# Altium PCB Thruster_V1.0.PcbDoc
Units mil, origin at the board's own origin, x right, y up, seen from the top; angles counter-clockwise.
Board outline 2185 x 1425 mil, 2 copper layers (Top Layer, Bottom Layer); 65 components, 50 nets, 244 pads, 29 vias.
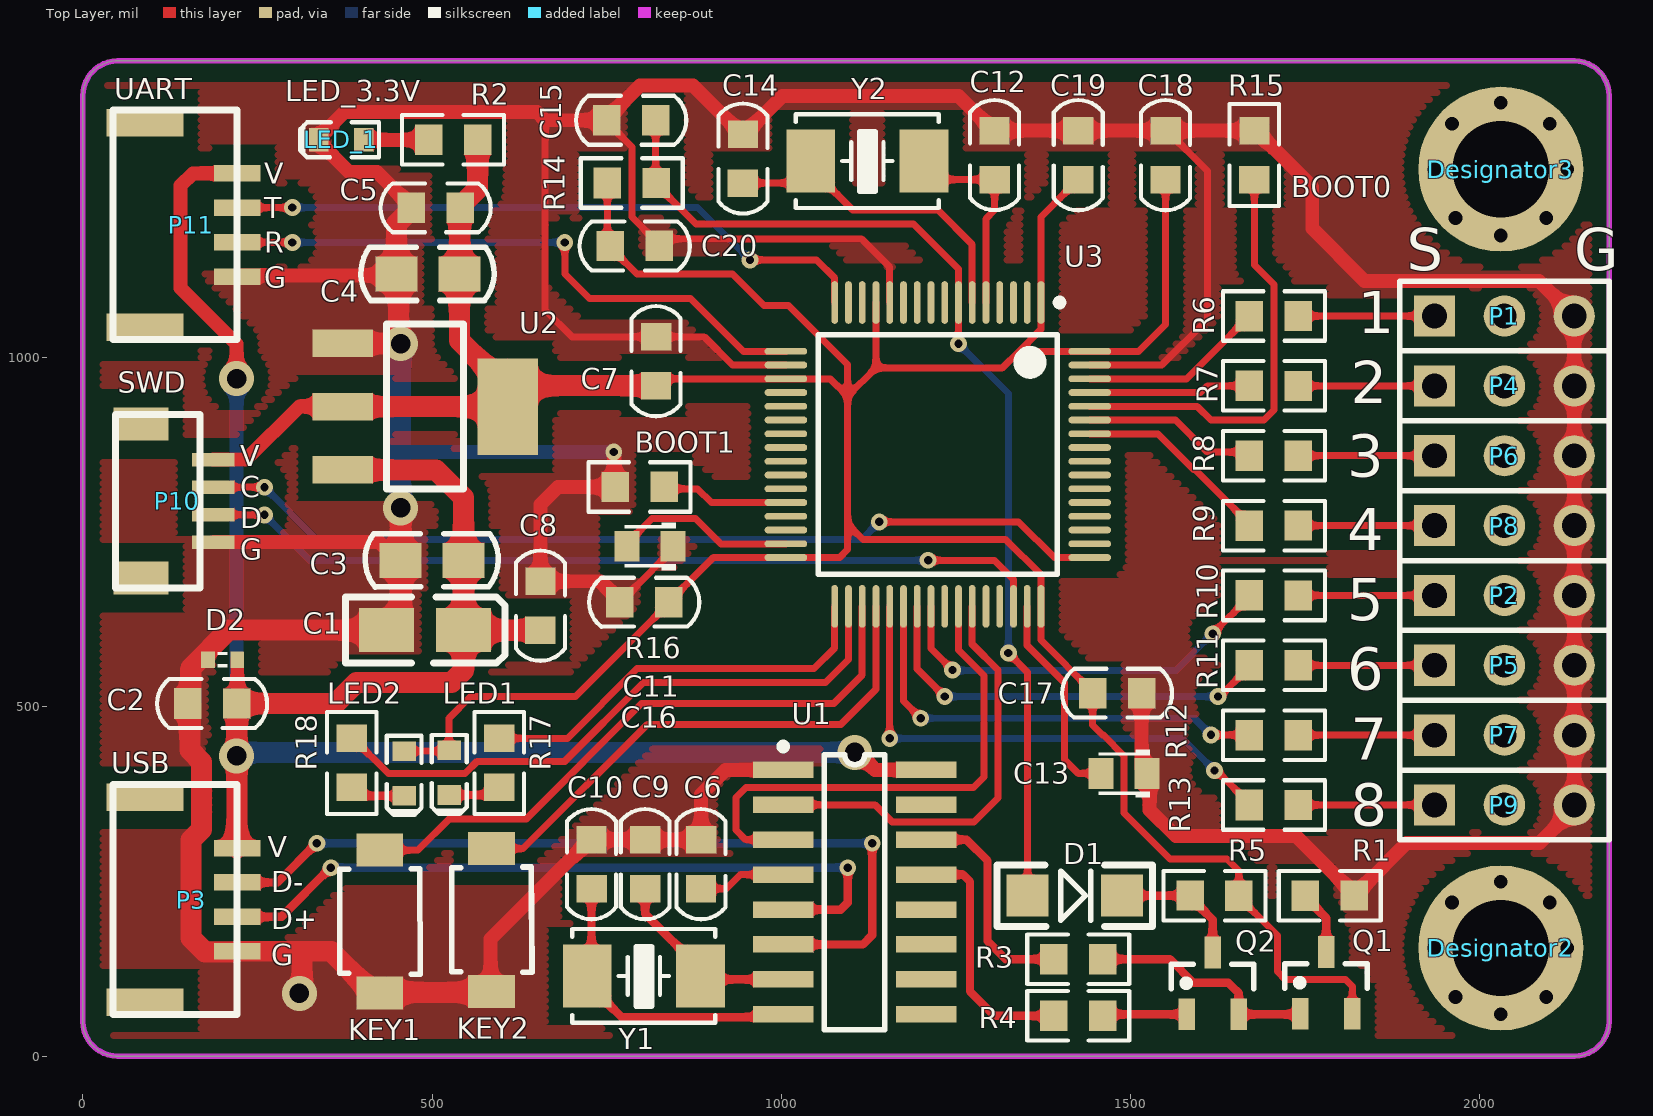
[diagram p0: Top Layer view]
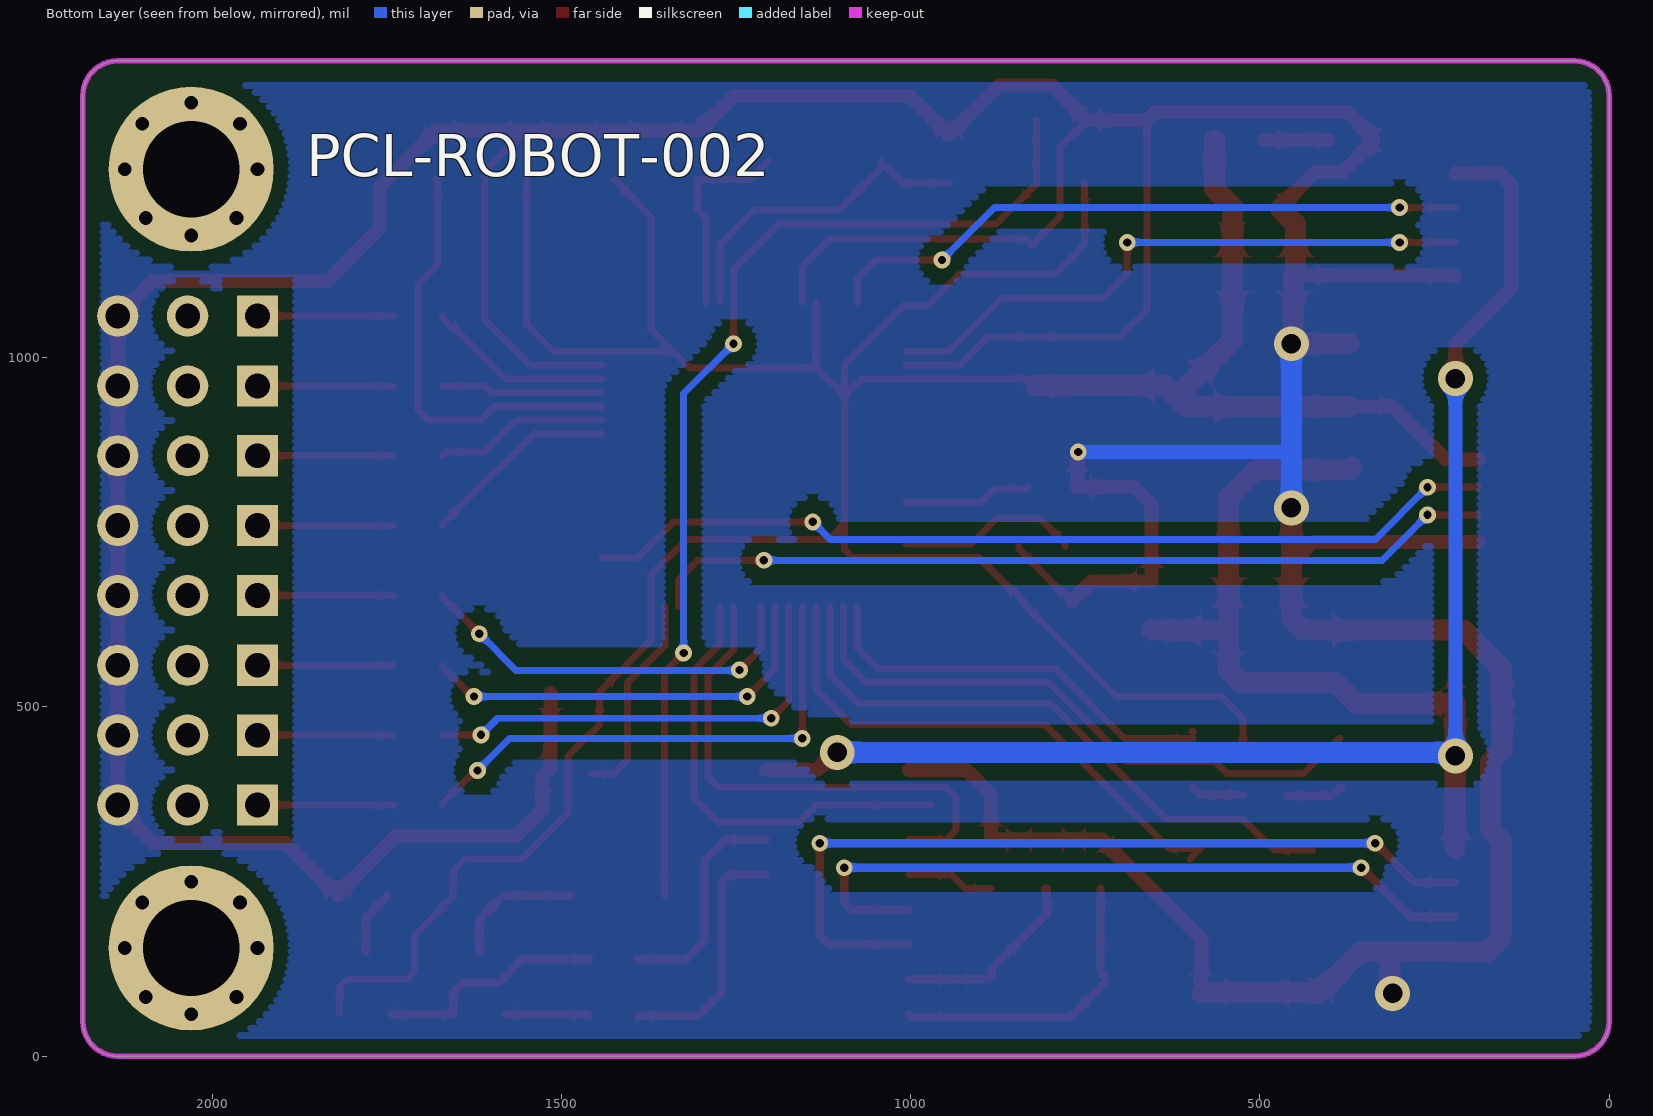
[diagram p1: Bottom Layer view, seen from below]
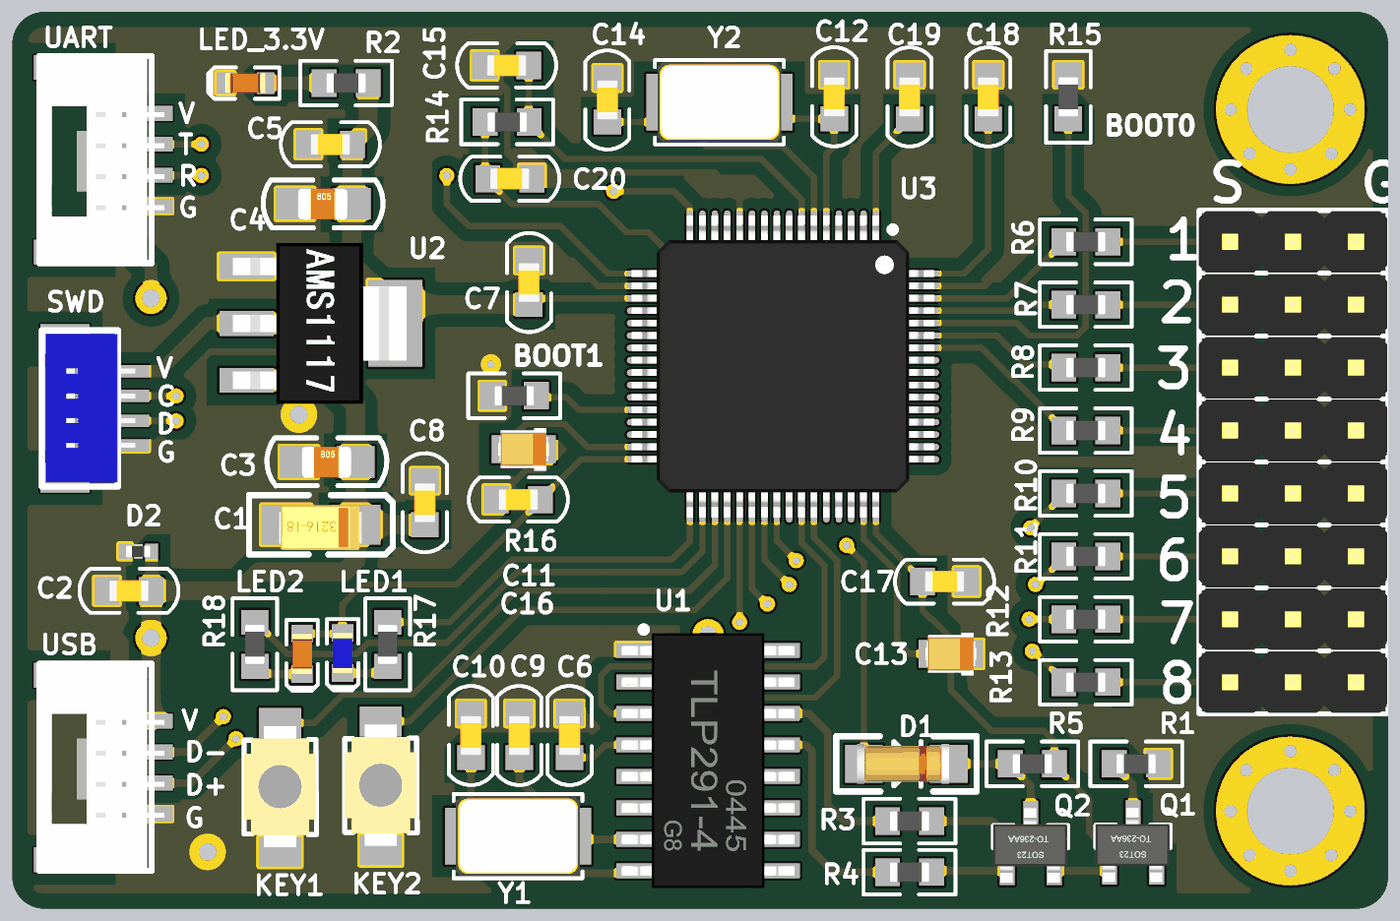
[diagram p2: 3D render of the assembled board from above, using the file's embedded part models]

## Layer stack, top to bottom
Top Solder: solder mask 0.4, Solder Resist, Dk 3.5
Top Layer: signal copper 1.4
Dielectric 1: dielectric 12.6, FR-4, Dk 4.8
Bottom Layer: signal copper 1.4
Bottom Solder: solder mask 0.4, Solder Resist, Dk 3.5

## Board outline
0,50 0,1375 cw(c50,1375) 50,1425 2135,1425 cw(c2135,1375) 2185,1375 2185,50 cw(c2135,50) 2135,0 50,0 cw(c50,50)

## Design rules (kind name [scope] priority, off if disabled: settings)
Clearance Clearance_InPolygon [All vs InPolygon] p1: gap=20 ignorepadtopadclearanceinfootprint=FALSE except(0: Arc-Hole Track-Hole SMDPad-Hole THPad-Hole Via-Hole Fill-Hole Poly-Hole Region-Hole Text-Hole)
Clearance Clearance_8 [All] p2: gap=8 ignorepadtopadclearanceinfootprint=FALSE except(0: Arc-Hole Track-Hole SMDPad-Hole THPad-Hole Via-Hole Fill-Hole Poly-Hole Region-Hole Text-Hole)
Clearance Clearance_MCU [(InComponent('U3'))] p3: gap=6 ignorepadtopadclearanceinfootprint=TRUE except(0: Arc-Hole Track-Hole SMDPad-Hole THPad-Hole Via-Hole Fill-Hole Poly-Hole Region-Hole Text-Hole)
Clearance [All] p4: gap=10 ignorepadtopadclearanceinfootprint=FALSE except(0: Arc-Hole Track-Hole SMDPad-Hole THPad-Hole Via-Hole Fill-Hole Poly-Hole Region-Hole Text-Hole)
ComponentClearance ComponentClearance_PWM [InComponent('P1')OR InComponent('P2')OR InComponent('P4')OR InComponent('P6')OR InComponent('P5')OR InComponent('P7')OR InComponent('P8')OR InComponent('P9')] p1: gap=0 collisioncheckmode=3 verticalgap=0 showdistances=TRUE
ComponentClearance [All] p2: gap=10 collisioncheckmode=3 verticalgap=10 showdistances=FALSE
HoleSize [All] p1: absolutevalues=TRUE maxlimit=300 minlimit=1 maxpercent=80.000 minpercent=20.000
MinimumSolderMaskSliver [All] p1: minsoldermaskwidth=1
PolygonConnect [All] p1: connectstyle=Direct reliefconductorwidth=10 reliefentries=4 polygonreliefangle="90 Angle" airgapwidth=10
RoutingVias RoutingVias_small [All] p1: holewidth=12 width=24 viastyle="Through Hole" minholewidth=8 minwidth=24 maxholewidth=28 maxwidth=50
RoutingVias [All] p2: holewidth=28 width=50 viastyle="Through Hole" minholewidth=28 minwidth=50 maxholewidth=28 maxwidth=50
SilkToSilkClearance [All] p1: silktosilkclearance=0
SilkToSolderMaskClearance [IsPad] p1: minsilkscreentomaskgap=0 clearancetoexposedcopper=TRUE
SolderMaskExpansion [All] p1: expansion=4
Width [All] p1: maxlimit=50 minlimit=10 preferedwidth=10
25 further rules are at their usual default settings.

## Components (designator, comment, footprint, x,y, rotation, side; value= is the part's Value field where it differs from the comment)
C1 "10uf/3216T/10V" "Cap Poll 1(3216T)" 490,610 r0 top value=10uF
C2 "0.1uF/0603/50V" 0603C 185,505 r180 top value=0.1uF
C3 "CAP" 0805C 500,710 r0 top value=22uF/0805/25V
C4 "CAP" 0805C 494,1120 r0 top value=22uF/0805/25V
C5 "0.1uF/0603/50V" 0603C 505,1214.61 r180 top value=0.1uF
C6 "0.1uF/0603/50V" 0603C 885,275 r90 top value=0.1uF
C7 "0.1uF/0603/50V" 0603C 820.57,995 r90 top value=0.01uF
C8 "0.1uF/0603/50V" 0603C 655,645 r270 top value=0.1uF
C9 "20pF/0603/50V" 0603C 805,275 r270 top value=0.1uF
C10 "20pF/0603/50V" 0603C 728.22,275 r270 top value=0.1uF
C11 "Cap_Tan_0805" Cap_Tan_0805 812,730 r0 top value=2.2uF
C12 "20pF/0603/50V" 0603C 1305.26,1290.14 r270 top value=0.1uF
C13 "Cap_Tan_0805" Cap_Tan_0805 1490.57,404.71 r0 top value=2.2uF
C14 "20pF/0603/50V" 0603C 945,1285.14 r270 top value=0.1uF
C15 "0.1uF/0603/50V" 0603C 785,1340 r180 top value=0.1uF
C16 "0.1uF/0603/50V" 0603C 803.57,650 r180 top value=0.01uF
C17 "0.1uF/0603/50V" 0603C 1480.57,519.71 r0 top value=0.01uF
C18 "0.1uF/0603/50V" 0603C 1550,1290 r90 top value=0.01uF
C19 "0.1uF/0603/50V" 0603C 1425,1290 r90 top value=0.01uF
C20 "0.1uF/0603/50V" 0603C 790,1160 r0 top value=0.01uF
D1 "1N4148" 1206D 1420,230 r180 top
D2 "PESD0402-140" 0402R 200,567.76 r0 top
Designator2 "Comment" M3固定孔 2030,155 r0 top
Designator3 "Comment" M3固定孔 2030,1270 r0 top
KEY1 "KEY1" "button-3x4x2mm 2 Pad" 425,192.64 r90 top
KEY2 "KEY2" "button-3x4x2mm 2 Pad" 585,195 r90 top
LED1 "LED_0603" LED_0603_BLUE 524.54,406 r90 top
LED2 "LED_0603" LED_0603_RED 460,404.71 r90 top
LED_1 "LED_3.3V" LED_0603_RED 370,1312 r0 top
P1 "HEADER3" HEADER3 1935,1059.71 r0 top locked
P2 "HEADER3" HEADER3 1935,659.71 r0 top locked
P3 "USB" HEADER-GH1.25-4P 155,224.15 r270 top
P4 "HEADER3" HEADER3 1935,959.71 r0 top locked
P5 "HEADER3" HEADER3 1935,559.71 r0 top locked
P6 "HEADER3" HEADER3 1935,859.71 r0 top locked
P7 "HEADER3" HEADER3 1935,459.71 r0 top locked
P8 "HEADER3" HEADER3 1935,759.71 r0 top locked
P9 "HEADER3" HEADER3 1935,359.71 r0 top locked
P10 "SWD" HEADER-SH1.0-4P-A 135,795 r270 top
P11 "UART" HEADER-GH1.25-4P 155,1190 r270 top
Q1 "PNP(S9012/S8550)" NPN(S8050/S9103)贴片 1780,105 r270 top
Q2 "NPN（S9013/S8050）" NPN(S8050/S9103)贴片 1617.4,104.29 r270 top
R1 "1KΩ/0603/5%" 0603R 1785,230 r180 top value=10K
R2 "510Ω/0603/5%" 0603R 530,1312 r0 top value=510Ω
R3 "1KΩ/0603/5%" 0603R 1425,138.94 r180 top value=10K
R4 "1KΩ/0603/5%" 0603R 1425,57.83 r180 top value=10K
R5 "10KΩ/0603/5%" 0603R 1620,230 r0 top value=10K
R6 "1KΩ/0603/5%" 0603R 1705,1059.71 r180 top value=10K
R7 "1KΩ/0603/5%" 0603R 1705,959.71 r180 top value=10K
R8 "1KΩ/0603/5%" 0603R 1705,859.71 r180 top value=10K
R9 "1KΩ/0603/5%" 0603R 1705,759.71 r180 top value=10K
R10 "1KΩ/0603/5%" 0603R 1705,659.71 r180 top value=10K
R11 "1KΩ/0603/5%" 0603R 1705,559.71 r180 top value=10K
R12 "1KΩ/0603/5%" 0603R 1705,459.71 r180 top value=10K
R13 "1KΩ/0603/5%" 0603R 1705,359.71 r180 top value=10K
R14 "10KΩ/0603/5%" 0603R 785.85,1250.14 r180 top value=10K
R15 "10KΩ/0603/5%" 0603R 1677.17,1290.14 r270 top value=10K
R16 "10KΩ/0603/5%" 0603R 797,815 r0 top value=10K
R17 "680Ω/0603/5%" 0603R 595.98,420 r270 top value=10K
R18 "680Ω/0603/5%" 0603R 385,420 r270 top value=10K
U1 "CH340G" SOP16M 1105,235 r270 top
U2 "AMS1117-3.3" AMS1117(SOT-223) 490,930 r180 top
U3 "STM32F405RGT6" STM32_LQFP64 1210,860.58 r180 top
Y1 "12MHz/5032" XT_5032_2P 803.03,115 r0 top value=32.768KHz
Y2 "8MHz/5032" XT_5032_2P 1123,1281.45 r0 top value=32.768KHz

## Footprints (in the part's own frame and the unit in brackets; to place one, negate y for a bottom-side part, rotate by r counter-clockwise, add the part's x,y. Pads: shape width x height; smd on the part's side, far side on the other; paste and mask are expansions set on the pad)
0402R [mil] "贴片电阻的英制0402封装（公制1005）"
  rect 20x24 smd: 1(-21,0) 2(21,0)
  Top Layer pour cut-out: -11,12 11,12 11,-12 -11,-12
  silkscreen extent -7,-11 7,11, body extent -20,-10 19,10, height 24
0603C [mm] "电容0603封装"
  rect 1x1.1 smd: 1(-0.889,0)
  rect 1x1.11 smd: 2(0.889,0)
  silkscreen extent -2,-0.89 2,0.89, body extent -0.8,-0.43 0.8,0.43, height 0.8
0603R [mm] "电阻的0603封装"
  rect 1x1.1 smd: 1(-0.889,0)
  rect 1x1.11 smd: 2(0.889,0)
  silkscreen extent -1.85,-0.9 1.85,0.9, body extent -0.8,-0.4 0.8,0.4, height 0.55
0805C [mil] "电容的0805封装"
  rect 60x50 smd: 1(-45,0) 2(45,0)
  silkscreen extent -96,-38 95,38, body extent -40,-25 38,24, height 31
1206D [mil] "1N4148 IN4148 LL4148 1206封装 圆柱形"
  rect 60x60 smd: 1(67.5,0) 2(-67.5,0)
  silkscreen extent -112,-44 112,44, body extent -68,-31 78,31, height 62
AMS1117(SOT-223) [mm]
  rect 2.2x1 smd: 1(3,-2.3) 2(3,0) 3(3,2.3)
  rect 2.2x3.5 smd: 2(-3,0)
  silkscreen extent -1.4,-3 1.4,3, body extent -3.45,-3.25 3.55,3.25, height 1.85
"button-3x4x2mm 2 Pad" [mm] "贴片按键封装，3x4x2mm - 2 Pad"
  rect 1.2x1.7 smd: 1(-2.6,0) 2(2.6,0)
  silkscreen extent -1.91,-1.47 1.93,1.45, body extent -2.42,-1.45 2.48,1.45, height 2
"Cap Poll 1(3216T)" [mm] "电解电容，钽电容，3216T封装尺寸，4.8 mmX 1.2mm"
  rect 2x1.6 smd: 1(1.4,0) 2(-1.4,0)
  silkscreen extent -2.9,-1.2 2.9,1.2, body extent -1.72,-1.01 1.68,0.79, height 1.8
Cap_Tan_0805 [mil] "钽电容，0805封装尺寸"
  rect 36x44 smd: 1(33,0) 2(-33,0)
  Top Layer pour cut-out: 15,-22 -15,-22 -15,22 15,22
  silkscreen extent -36,-34 36,34, body extent -40,-27 40,27, height 59
HEADER3 [mm]
  rect 1.5x1.5 hole 0.9: 1(0,0)
  round 1.5 hole 0.9: 2(2.54,0) 3(5.08,0)
  silkscreen extent -1.27,-1.27 6.35,1.27, body extent -1.3,-1.24 6.32,1.25, height 8.54
HEADER-GH1.25-4P [mm] "1.25mm立式贴片"
  rect 1x2.8 smd mask+0.07: 0(-3.725,-1.675) 0(3.725,-1.675)
  rect 0.6x1.7 smd mask+0.07: 1(-1.875,1.675) 2(-0.625,1.675) 3(0.625,1.675) 4(1.875,1.675)
  silkscreen extent -4.19,-2.85 4.17,1.68, body extent -4.07,-2.76 4.18,2.19, height 4.2
HEADER-SH1.0-4P-A [mm] "1mm卧式贴片"
  rect 0.5x1.55 smd mask+0.07: 1(-1.5,1.313) 2(-0.5,1.313) 3(0.5,1.313) 4(1.5,1.313)
  rect 1.2x2 smd mask+0.07: ""(-2.8,-1.312) ""(2.8,-1.312)
  silkscreen extent -3.15,-2.24 3.16,0.83, body extent -3,-2.08 3,1.52, height 4.25
LED_0603_BLUE [mil]
  rect 28x34 smd: 1(32,0) 2(-32,0)
  Top Layer pour cut-out: 18,-17 -18,-17 -18,17 18,17
  silkscreen extent -59,-25 54,25, body extent -31,-16 31,16, height 30
LED_0603_RED [mil]
  rect 28x34 smd: 1(32,0) 2(-32,0)
  Top Layer pour cut-out: 18,-17 -18,-17 -18,17 18,17
  silkscreen extent -59,-25 54,25, body extent -31,-16 31,16, height 30
M3固定孔 [mm]
  round 1 hole 0.5: 1(-2.413,0) 1(-1.778,1.651) 1(-1.651,-1.778) 1(0,-2.413) 1(0,2.413) 1(1.651,-1.778) 1(1.778,1.651) 1(2.413,0)
  round 6 hole 3.5: 1(0,0)
NPN(S8050/S9103)贴片 [mm] "SOT23-3贴片封装 ,S8050,S9103"
  rect 1.15x0.6 smd: B(1.125,-0.95) C(-1.125,0) E(1.125,0.95)
  silkscreen extent -0.7,-1.5 0.2,1.5, body extent -1.4,-1.52 1.6,1.48, height 1.3
SOP16M [mm]
  rect 0.6x2.2 smd: 1(-4.445,-2.6) 2(-3.175,-2.6) 3(-1.905,-2.6) 4(-0.635,-2.6) 5(0.635,-2.6) 6(1.905,-2.6) 7(3.175,-2.6) 8(4.445,-2.6) 9(4.445,2.6) 10(3.175,2.6) 11(1.905,2.6) 12(0.635,2.6) 13(-0.635,2.6) 14(-1.905,2.6) 15(-3.175,2.6) 16(-4.445,2.6)
  silkscreen extent -5.42,-2.72 5,1.1, body extent -5.15,-3.5 5.15,3.5, height 2.1
STM32_LQFP64 [mm] "Thin QFP, 64-Leads, Body 10x10mm, Pitch 0.5mm, IPC High Density"
  oval 0.25x1.55 smd: 1(-4.106,-5.55) 2(-3.606,-5.55) 3(-3.106,-5.55) 4(-2.606,-5.55) 5(-2.106,-5.55) 6(-1.606,-5.55) 7(-1.106,-5.55) 8(-0.606,-5.55) 9(-0.106,-5.55) 10(0.394,-5.55) 11(0.894,-5.55) 12(1.394,-5.55) 13(1.894,-5.55) 14(2.394,-5.55) 15(2.894,-5.55) 16(3.394,-5.55) 33(3.394,5.5) 34(2.894,5.5) 35(2.394,5.5) 36(1.894,5.5) 37(1.394,5.5) 38(0.894,5.5) 39(0.394,5.5) 40(-0.106,5.5) 41(-0.606,5.5) 42(-1.106,5.5) 43(-1.606,5.5) 44(-2.106,5.5) 45(-2.606,5.5) 46(-3.106,5.5) 47(-3.606,5.5) 48(-4.106,5.5)
  oval 1.55x0.25 smd: 17(5.169,-3.775) 18(5.169,-3.275) 19(5.169,-2.775) 20(5.169,-2.275) 21(5.169,-1.775) 22(5.169,-1.275) 23(5.169,-0.775) 24(5.169,-0.275) 25(5.169,0.225) 26(5.169,0.725) 27(5.169,1.225) 28(5.169,1.725) 29(5.169,2.225) 30(5.169,2.725) 31(5.169,3.225) 32(5.169,3.725) 49(-5.881,3.725) 50(-5.881,3.225) 51(-5.881,2.725) 52(-5.881,2.225) 53(-5.881,1.725) 54(-5.881,1.225) 55(-5.881,0.725) 56(-5.881,0.225) 57(-5.881,-0.275) 58(-5.881,-0.775) 59(-5.881,-1.275) 60(-5.881,-1.775) 61(-5.881,-2.275) 62(-5.881,-2.775) 63(-5.881,-3.275) 64(-5.881,-3.775)
  silkscreen extent -4.91,-5.68 3.99,4.32, body extent -6.45,-6.13 5.75,6.07, height 1.59
XT_5032_2P [mil] "XTAL_5032_2P"
  rect 70x90 smd: 1(-81,0) 2(81,0)
  silkscreen extent -102,-67 102,67, body extent -98,-63 98,63, height 39

## Part data
C1: library part "Cap Poll", "Polarized Capacitor (Surface Mount)(钽电容)"
C2 C3 C4 C5 C6 C7 C8 C9 C10 C12 C14 C15 C16 C17 C18 C19 C20: library part CAP_0805/0603/0402, "CAP 0805 0603 0402"
C11 C13: "Polarized Capacitor (Surface Mount)(钽电容)"
D1: library part D
D2: library part Diode-PESD0402-140, "TVS二极管"
KEY1 KEY2: library part KEY, "按键"
LED1 LED2: "LED"
LED_1: library part LED, "Typical RED, GREEN, YELLOW, AMBER GaAs LED"
P1 P2 P4 P5 P6 P7 P8 P9: "Header, 3-Pin"
P3 P11: library part HEADER4, "Header, 4-Pin"
P10: library part SWD-下载接口, "SWD调试下载接口"
Q1: "PNP Bipolar Transistor"
Q2: library part NPN(S9103/S8050), "NPN Bipolar Transistor"
R1 R2 R3 R4 R5 R6 R7 R8 R9 R10 R11 R12 R13 R14 R15 R16: library part Res, "Resistor", power=1/16W, precision=1%
R17 R18: library part Res, "Resistor", precision=1%
U1: "USB2UART"
U2: library part AMS1117
U3: "STM32 ARM-based 32-bit MCU with 1024 Kbytes of Flash memory, 64-pin LQFP, Industrial Temperature"
Y1 Y2: library part XTAL, "Crystal Oscillator"

## Via types
v1: diameter 24, hole 12, Top Layer to Bottom Layer, 23 vias
v2: diameter 50, hole 28, Top Layer to Bottom Layer, 6 vias

## Nets (pads, with @x,y where several pads share a name; then routed paths per layer and width w, separated by ;. In a path a pad name is that pad's centre, name@x,y a point inside that pad or via, vN(x,y) a via of type N, cw(c..) or ccw(c..) an arc to the next point about the centre after c; other vN are vias at no path point)
+3.3V: C4.2 C5.1 C7.1 C16.1 C17.1 C18.1 C19.1 C20.1 LED1.1 LED2.1 P10.1 Q1.E R2.2 R5.2 R14.2 U2.2 U3.1 U3.13 U3.19 U3.32 U3.48 U3.64 | length 5242.6
  Top Layer w10: LED2.1 523.26,436.71 LED1.1@523.9,437.36 ; LED1.1 LED1.1@523.9,437.36 ; R14.2 750.85,1162.18 C20.1@755,1158.03 ; C20.1 C20.1@755,1158.03 ; C7.1 830.42,969.85 U3.19 1070,969.85 1094.85,945 ; U3.13@1135.34,1079.18 U3.13 1135.42,985.57 ; C19.1 1423.03,1255 1408.35,1240.31 1408.35,1238.35 1371.64,1201.64 U3.1 1371.56,1079.02 1371.56,1040.78 1340,1009.22 ; C18.1 1550,1047.83 1511.38,1009.22 U3.64 1340,1009.22 ; Q1.E 1817.4,100 1807.4,110 1721.19,110 1710,121.19 1710,172.83 1655,227.83 R5.2 1655,265 1637.69,282.31 1556.26,282.31 1490.57,348 1490.57,430.1 1460.96,459.71 1460,459.71 1445.57,474.14 C17.1 1445.57,521.68 1371.64,595.62 U3.48 U3.48 1371.56,689.5 1321.06,740 1116.72,740 1094.85,761.88 ; LED1.1@523.9,437.36 523.9,483.9 555,515 705.54,515 838.57,648.03 C16.1 838.57,651.97 853.26,666.65 855.23,666.65 902.52,713.94 U3.32 1083.59,713.94 1094.85,725.2 1094.85,761.88 ; C20.1@755,1158.03 793.03,1120 930,1120 975,1075 1010,1075 1094.85,990.15 1094.85,945 ; 1094.85,761.88 1094.85,945 ; 1094.85,945 1135.42,985.57 ; 1135.42,985.57 1315.21,985.57 1315.78,985 1340,1009.22
  Top Layer w20: P10.1 233.82,854.05 310.24,930.48 371.41,930.48 U2.2@371.89,930
  Top Layer w30: U2.2@371.89,930 608.11,930 U2.2@608.11,931.69 ; R2.2 565,1241.57 539.5,1216.07 539.5,1120.5 C4.2 539,1024.7 608.11,955.59 U2.2@608.11,931.69 ; C7.1 636.42,960 U2.2@608.11,931.69
+5V: C1.1 C2.1 C3.2 C8.2 D2.2 P3.1 P11.1 U1.16 U2.3 | length 3104.9
  Top Layer w20: C2.1 221,506 D2.2 ; v2(220,970) 220,1020 140,1100 140,1246.34 157.48,1263.82 P11.1 ; v2(1105,435) 1109.06,435 1134.06,410 U1.16
  Top Layer w30: P3.1 220.47,298.44 220.47,504.53 C2.1 361.52,505 391.52,535 527.54,535 545.12,552.57 C1.1 ; U2.3@368.19,843.15 U2.3 505.55,839.45 545,800 C3.2 545.06,709.94 545.06,610.06 C1.1 ; C8.2 C1.1
  Bottom Layer w20: v2(220,430) v2(220,970)
  Bottom Layer w30: v2(220,430) 225,435 v2(1105,435)
BOOT0: R15.2 U3.60 | length 621.4
  Top Layer w10: U3.60 1595.31,930.48 1615,910.79 1690.79,910.79 1705,925 1705,1105 1677.17,1132.83 R15.2 R15.2@1679.33,1255.14
BOOT1: R16.2 U3.28 | length 183.7
  Top Layer w10: R16.2 834.63,812.37 880,812.37 899.69,792.68 U3.28
CH340_D+: P3.3 U1.5 | length 1049.7
  Top Layer w12: P3.3 284.31,199.54 284.54,199.77 354.77,270 v1(355.1,270) ; U1.5 1085,210 1095,220 v1(1095,270)
  Bottom Layer w12: v1(355.1,270) v1(1095,270)
CH340_D-: P3.2 U1.6 | length 1196.9
  Top Layer w12: P3.2 278.56,248.76 279.8,250 334.8,305 v1(335,305) ; U1.6 1116.72,160 1130,173.28 v1(1130,305)
  Bottom Layer w12: v1(335,305) v1(1130,305)
GND: C1.2 C2.2 C3.1 C4.1 C5.2 C6.2 C7.2 C8.1 C9.1 C10.1 C11.1 C12.1 C13.1 C14.1 C15.2 C16.2 C17.2 C18.2 C19.2 C20.2 D2.1 KEY1.1 KEY2.1 LED_1.2 P1.3 P2.3 P3.4 P4.3 P5.3 P6.3 P7.3 P8.3 P9.3 P10.4 P11.4 R1.1 R15.1 R16.1 U1.1 U2.1 U3.12 U3.18 U3.63 | length 9482.4
  Top Layer w10: 661.85,1340 661.85,1068.15 700,1030 C7.2 889.53,1030 930,989.53 U3.18 ; C15.2 750,1337.83 785.85,1301.98 785.85,1201.31 825,1162.17 C20.2 835,1170 1115,1170 1155.1,1129.9 U3.12 ; C16.2@768.57,652.17 783.26,666.85 785.85,666.85 845,726 C11.1 ; U1.1@1001.68,409.04 U1.1 ; U3.63 1544.53,989.53 1610,1055 1610,1267.17 1552.17,1325 C18.2 C18.2@1550.14,1325.14
  Top Layer w20: P10.4 424.06,735.94 450,710 C3.1 ; P11.4 222.76,1117.99 446.99,1117.99 C4.1 ; C5.2 470,1216.77 421.04,1265.73 381.27,1265.73 338,1309 LED_1.2 338,1315 374.85,1351.85 650,1351.85 661.85,1340 C15.2 750,1342.17 797.83,1390 873.18,1390 943.03,1320.14 C14.1 946.97,1320.14 1001.82,1375 1253.44,1375 1303.29,1325.14 C12.1 1550.14,1325.14 R15.1 1679.13,1325.14 1760,1244.28 1760,1185 1835,1110 2084.71,1110 P1.3 P4.3 P6.3 P8.3 P2.3 P5.3 P7.3 P9.3 2135,355 2085,305 1895,305 1831.65,241.65 1829.69,241.65 R1.1@1820,231.97 ; KEY2.1@583.82,91.46 583.82,167.57 726.25,310 C10.1 C9.1 C6.2 885,375 920,410 U1.1 ; v1(760,865) 760.77,864.23 760.77,816.23 R16.1 680,815 655,790 C8.1 740.74,680 768.57,652.17 C16.2 ; C17.2 1515.57,412.71 C13.1 1527.29,401 1527.29,352.71 1565,315 1736.97,315 R1.1@1820,231.97 ; R1.1 R1.1@1820,231.97
  Top Layer w30: v2(310,90) 313.83,93.83 313.83,149.16 315,150.33 ; U2.1 372.17,1020.28 454.72,1020.28 452,1023 452,1117 C4.1 449,1191.44 470,1212.44 C5.2 ; KEY1.1@424.86,90.14 KEY1.1 ; v2(455,785) C3.1 455,626.5 438.5,610 C1.2 208.71,610 154.69,555.98 154.69,509.69 C2.2 153.12,501.88 153.12,438.15 170,421.27 170,324.83 155,309.83 155,169.29 175,149.29 219.91,149.29 P3.4 315,150.33 ; KEY2.1@583.82,91.46 426.18,91.46 KEY1.1 ; 315,150.33 355.1,150.33 415.16,90.28 KEY1.1
  Bottom Layer w20: 455,870 460,865 v1(760,865)
  Bottom Layer w30: v2(455,785) 455,870 v2(455,1020)
KEY1: KEY1.2 U3.35 | length 892.9
  Top Layer w10: KEY1.2 480,295 525,340 635,340 800,505 1075,505 1115.73,545.73 U3.35
KEY2: KEY2.2 U3.36 | length 784.8
  Top Layer w10: KEY2.2@600.05,282.31 KEY2.2 630.36,297.36 808,475 1085,475 1135.42,525.42 U3.36
LED1: R17.1 U3.33 | length 595.6
  Top Layer w10: R17.1@595,465 R17.1@596.97,465 ; R17.1 693.57,455 793.57,555 1046.95,555 1076.36,584.41 U3.33
LED2: R18.1 U3.34 | length 875.7
  Top Layer w10: R18.1 386.97,455 437.26,404.71 547,404.71 564.6,422.31 689.89,422.31 802.57,535 1063.28,535 1096.05,567.76 U3.34
NetC6_1: C6.1 U1.4 | length 125.9
  Top Layer w10: C6.1 921.65,240 941.65,260 U1.4
NetC9_2: C9.2 U1.7 Y1.2 | length 273.5
  Top Layer w12: C9.2@807.17,240 C9.2 805,204.03 884.03,125 Y1.2 ; Y1.2@889.03,110 U1.7
NetC10_2: C10.2 U1.8 Y1.1 | length 430.1
  Top Layer w12: Y1.1@722.03,105 771.03,56 998.64,56 U1.8 ; Y1.1 728.22,121.19 C10.2
NetD1_2: D1.2 Q2.C R5.1 | length 192.3
  Top Layer w12: D1.2 R5.1 1585,228.03 1617.4,195.63 Q2.C
NetLED1_2: LED1.2 R17.2 | length 76
  Top Layer w12: LED1.2 584.98,374 R17.2
NetLED2_2: LED2.2 R18.2 | length 82.9
  Top Layer w12: R18.2@383,383 R18.2 397.29,372.71 LED2.2
NetLED_1_1: LED_1.1 R2.1 | length 93
  Top Layer w20: LED_1.1 R2.1
NetQ1_B: Q1.B Q2.E R3.1 | length 333.3
  Top Layer w12: R3.1 1556.06,138.94 1590,105 1640,105 1645,100 1645.08,100 1654.8,90.28 Q2.E 1741.89,60 Q1.B
NetQ1_C: Q1.C R1.2 | length 93.1
  Top Layer w12: R1.2 1750,227.83 1780,197.83 Q1.C
NetQ2_B: Q2.B R4.1 | length 120.9
  Top Layer w12: R4.1 1462.17,60 Q2.B
NetR3_2: R3.2 U1.14 | length 320.9
  Top Layer w12: U1.14 1265,310 1295,280 1295,165 1321.06,138.94 R3.2
NetR4_2: R4.2 U1.13 | length 360.6
  Top Layer w12: U1.13 1260,260 1270,250 1270,92.9 1305.06,57.83 R4.2 R4.2@1390,55.67
OSC_IN: C12.2 U3.5 Y2.2 | length 293.3
  Top Layer w10: Y2.2 1230.3,1255.14 C12.2 1305.26,1211.28 1292.9,1198.92 U3.5
OSC_OUT: C14.2 U3.6 Y2.1 | length 479
  Top Layer w10: C14.2 1012,1250.14 Y2.1@1042,1280.14 ; Y2.1 Y2.1@1042,1280.14 ; U3.6 1273.21,1162.13 1224.06,1211.28 1102.16,1211.28 1042,1271.45 Y2.1@1042,1280.14
PWMOUT_1: P1.1 R6.1 | length 195
  Top Layer w10: R6.1 P1.1
PWMOUT_2: P4.1 R7.1 | length 195
  Top Layer w10: R7.1 P4.1
PWMOUT_3: P6.1 R8.1 | length 195
  Top Layer w10: R8.1 P6.1
PWMOUT_4: P8.1 R9.1 | length 195
  Top Layer w10: R9.1 P8.1
PWMOUT_5: P2.1 R10.1 | length 195
  Top Layer w10: R10.1 P2.1
PWMOUT_6: P5.1 R11.1 | length 195
  Top Layer w10: R11.1 P5.1
PWMOUT_7: P7.1 R12.1 | length 195
  Top Layer w10: R12.1 P7.1
PWMOUT_8: P9.1 R13.1 | length 195
  Top Layer w10: R13.1 P9.1
RESET: C15.1 D1.1 R14.1 U3.7 | length 1512.9
  Top Layer w10: C15.1 820,1249.03 877.59,1191.44 1188.86,1191.44 1253.53,1126.78 U3.7 v1(1253.53,1020) ; v1(1325,577.24) 1352.5,549.74 D1.1
  Bottom Layer w10: v1(1253.53,1020) 1325,948.53 v1(1325,577.24)
SWCLK: P10.2 U3.49 | length 1317.5
  Top Layer w10: P10.2@186.83,814.84 P10.2 v1(260,814.68) ; v1(1140,765) 1339.71,765 1390.77,713.94 U3.49
  Bottom Layer w10: v1(260,814.68) 334.68,740 1115,740 v1(1140,765)
SWDIO: P10.3 U3.46 | length 1222.6
  Top Layer w10: P10.3 186.83,775.16 259.84,775.16 v1(260,775) ; v1(1210,709.94) 1305.06,709.94 1332.19,682.81 1332.19,644.14 U3.46
  Bottom Layer w10: v1(260,775) 325.06,709.94 v1(1210,709.94)
TIM3_CH1: R13.2 U3.37 | length 744.8
  Top Layer w10: v1(1155,455) 1155,643.96 U3.37 ; v1(1620,409.04) 1622.83,409.04 1670,361.88 R13.2
  Bottom Layer w10: v1(1155,455) 1574.04,455 v1(1620,409.04)
TIM3_CH2: R12.2 U3.38 | length 651
  Top Layer w10: U3.38 1174.79,508.5 v1(1199.38,483.9) ; v1(1615,460) 1669.71,460 R12.2
  Bottom Layer w10: v1(1199.38,483.9) 1591.1,483.9 v1(1615,460)
TIM3_CH3: R11.2 U3.39 | length 601.3
  Top Layer w10: U3.39 1194.47,554.37 v1(1233.84,515) ; v1(1625,515) 1627.45,515 1670,557.55 R11.2
  Bottom Layer w10: v1(1233.84,515) v1(1625,515)
TIM3_CH4: R10.2 U3.40 | length 574.9
  Top Layer w10: U3.40 1214.16,583.85 v1(1245,553) ; v1(1617.4,605) 1617.45,605 1670,657.55 R10.2
  Bottom Layer w10: v1(1245,553) 1245.76,552.24 1564.64,552.24 v1(1617.4,605)
TIM4_CH1: R9.2 U3.58 | length 284.2
  Top Layer w10: U3.58 1538.89,891.11 1590,840 1591.88,840 1670,761.88 R9.2
TIM4_CH2: R8.2 U3.59 | length 249.6
  Top Layer w10: U3.59 1563.92,910.79 1609.71,865 1664.71,865 R8.2
TIM4_CH3: R7.2 U3.61 | length 232.4
  Top Layer w10: U3.61 1600.16,950.16 1609.71,959.71 R7.2
TIM4_CH4: R6.2 U3.62 | length 267
  Top Layer w10: U3.62 1580.13,969.85 1653.15,1042.86 1655.31,1042.86 1670,1057.55 R6.2
USART1_RX: U1.2 U3.43 | length 653
  Top Layer w10: U1.2@971.14,360 U1.2 1133.86,360 1158.67,335.19 1275.45,335.19 1310,369.74 1310,553 1273.21,589.79 U3.43
USART1_TX: U1.3 U3.42 | length 746.5
  Top Layer w10: U1.3 948.82,310 935,323.82 935,370.67 949.14,384.81 1274.81,384.81 1290,400 1290,545 1253.53,581.47 U3.42
USART2_RX: P11.3 U3.17 | length 876.5
  Top Layer w10: P11.3 221.14,1165.2 299.8,1165.2 v1(300,1165) ; v1(689.89,1165) 689.89,1162.24 690,1162.13 690,1120 725,1085 869.95,1085 945.73,1009.22 U3.17
  Bottom Layer w10: v1(300,1165) v1(689.89,1165)
USART2_TX: P11.2 U3.16 | length 932.4
  Top Layer w10: P11.2 221.14,1214.8 299.8,1214.8 v1(300,1215) ; v1(955,1140) 1050.5,1140 1076.36,1114.14 U3.16
  Bottom Layer w10: v1(300,1215) 880,1215 v1(955,1140)
VCAP_1: C11.2 U3.31 | length 261.5
  Top Layer w10: C11.2 779,734 815,770 877.34,770 913.71,733.63 U3.31
VCAP_2: C13.2 U3.47 | length 302
  Top Layer w10: U3.47 1351.95,588.05 1405,535 1405,425 1425,405 1457.29,405 C13.2
pads on no net: Designator2.1 Designator3.1 P1.2 P2.2 P3.0 P4.2 P5.2 P6.2 P7.2 P8.2 P9.2 P10. P11.0 U1.9 U1.10 U1.11 U1.12 U1.15 U3.2 U3.3 U3.4 U3.8 U3.9 U3.10 U3.11 U3.14 U3.15 U3.20 U3.21 U3.22 U3.23 U3.24 U3.25 U3.26 U3.27 U3.29 U3.30 U3.41 U3.44 U3.45 U3.50 U3.51 U3.52 U3.53 U3.54 U3.55 U3.56 U3.57

## Polygon pours and split planes (outlines as drawn)
GND on Top Layer "GND_L01_P012" (hatched Horizontal grid 10 track 10, remove dead copper, pour order 12): 0,1425 5,1430 2185,1430 2185,0 0,0
GND on Top Layer "GND_L01_P006" (hatched Horizontal grid 10 track 10, remove dead copper, pour order 6): 0,1425
GND on Bottom Layer "GND_L02_P010" (hatched Horizontal grid 10 track 10, remove dead copper, pour order 10): 0,1425 2185,1425 2180,1420 2180,0 0,0

## Keep-outs
Keep-Out Layer:
  the board outline again, w8

## Silkscreen, mask and mechanical layers (free items; w line width, h text height)
Top Overlay:
  text "V" at 260,1249.43 h30
  text "BOOT0" at 1730,1230 h30
  text "T" at 260,1200 h30
  text "R" at 260,1150 h30
  text "S" at 1895,1125 h60
  text "G" at 2135,1125 h60
  text "G" at 260,1100 h30
  text "1" at 1825,1034.71 h60
  text "2" at 1815,934.71 h60
  text "BOOT1" at 790,864.23 h30
  text "V" at 225,845 h30
  text "3" at 1810,829.71 h60
  text "C" at 225,800 h30
  text "D" at 225,756 h30
  text "4" at 1810,724.71 h60
  text "G" at 225,711.11 h30
  text "5" at 1810,624.28 h60
  text "6" at 1810,524.71 h60
  text "7" at 1815,424.71 h60
  text "8" at 1815,329.71 h60
  text "V" at 265,285 h30
  text "D-" at 270,235 h30
  text "D+" at 270,182 h30
  text "G" at 270,130 h30
Bottom Overlay:
  text "PCL-ROBOT-002" at 1865,1260 h60